# Altium PCB Sedra.PcbDoc
Units mm, origin at the board's own origin, x right, y up, seen from the top; angles counter-clockwise.
Board outline 100 x 50 mm, 2 copper layers (Top Layer, Bottom Layer); 35 components, 13 nets, 89 pads, 32 vias.
Unrouted connection lines stored in the file: 10.
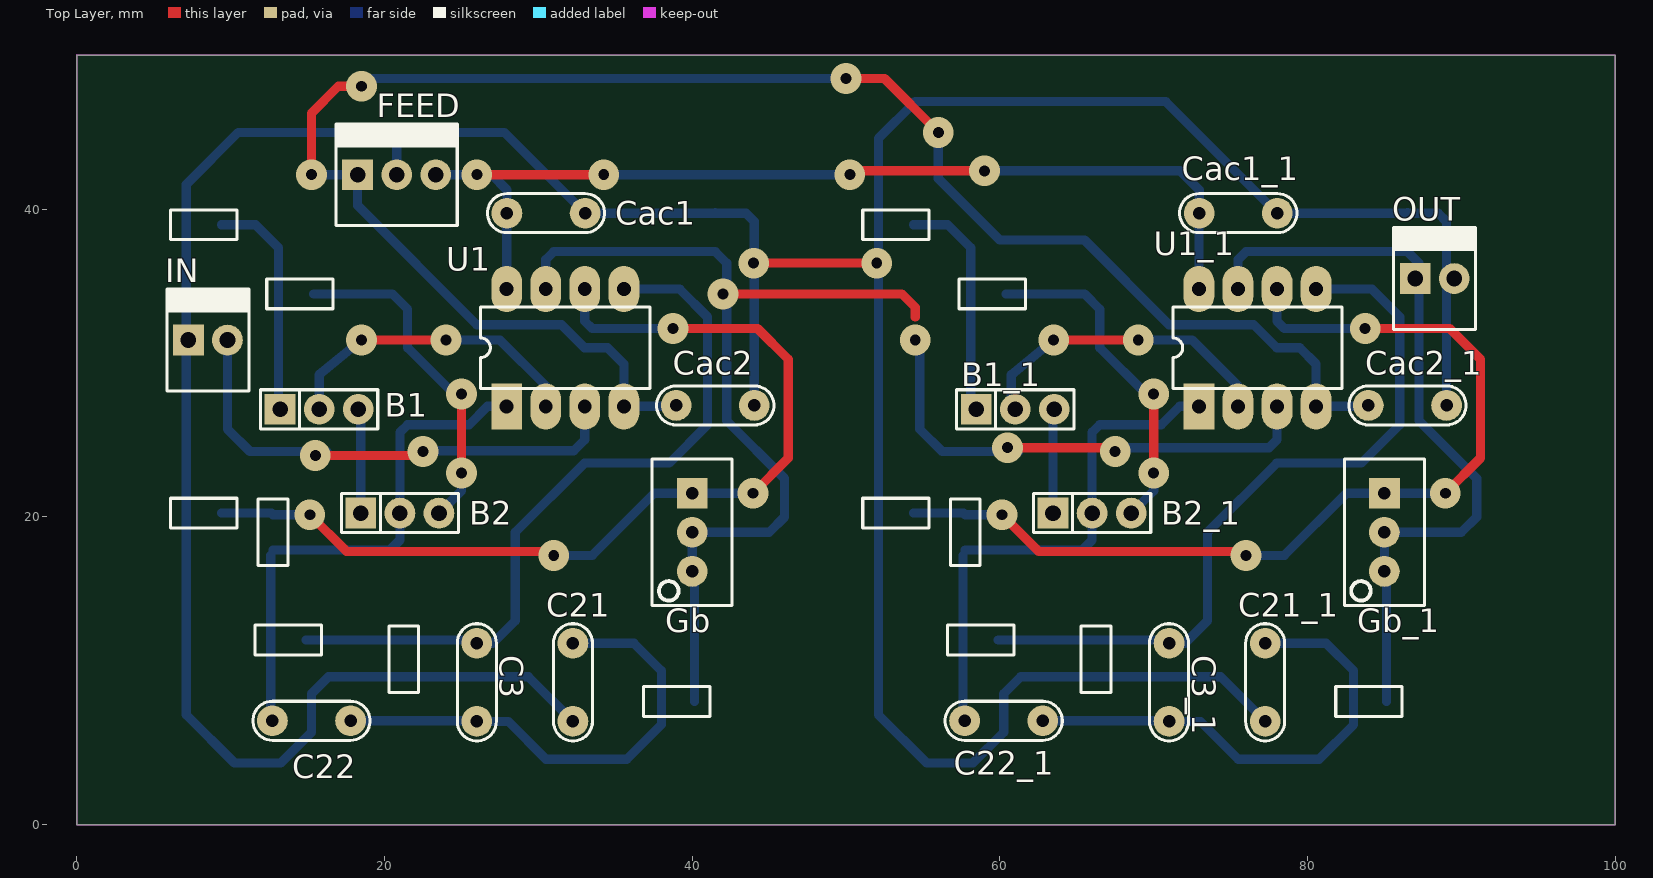
[diagram p0: Top Layer view]
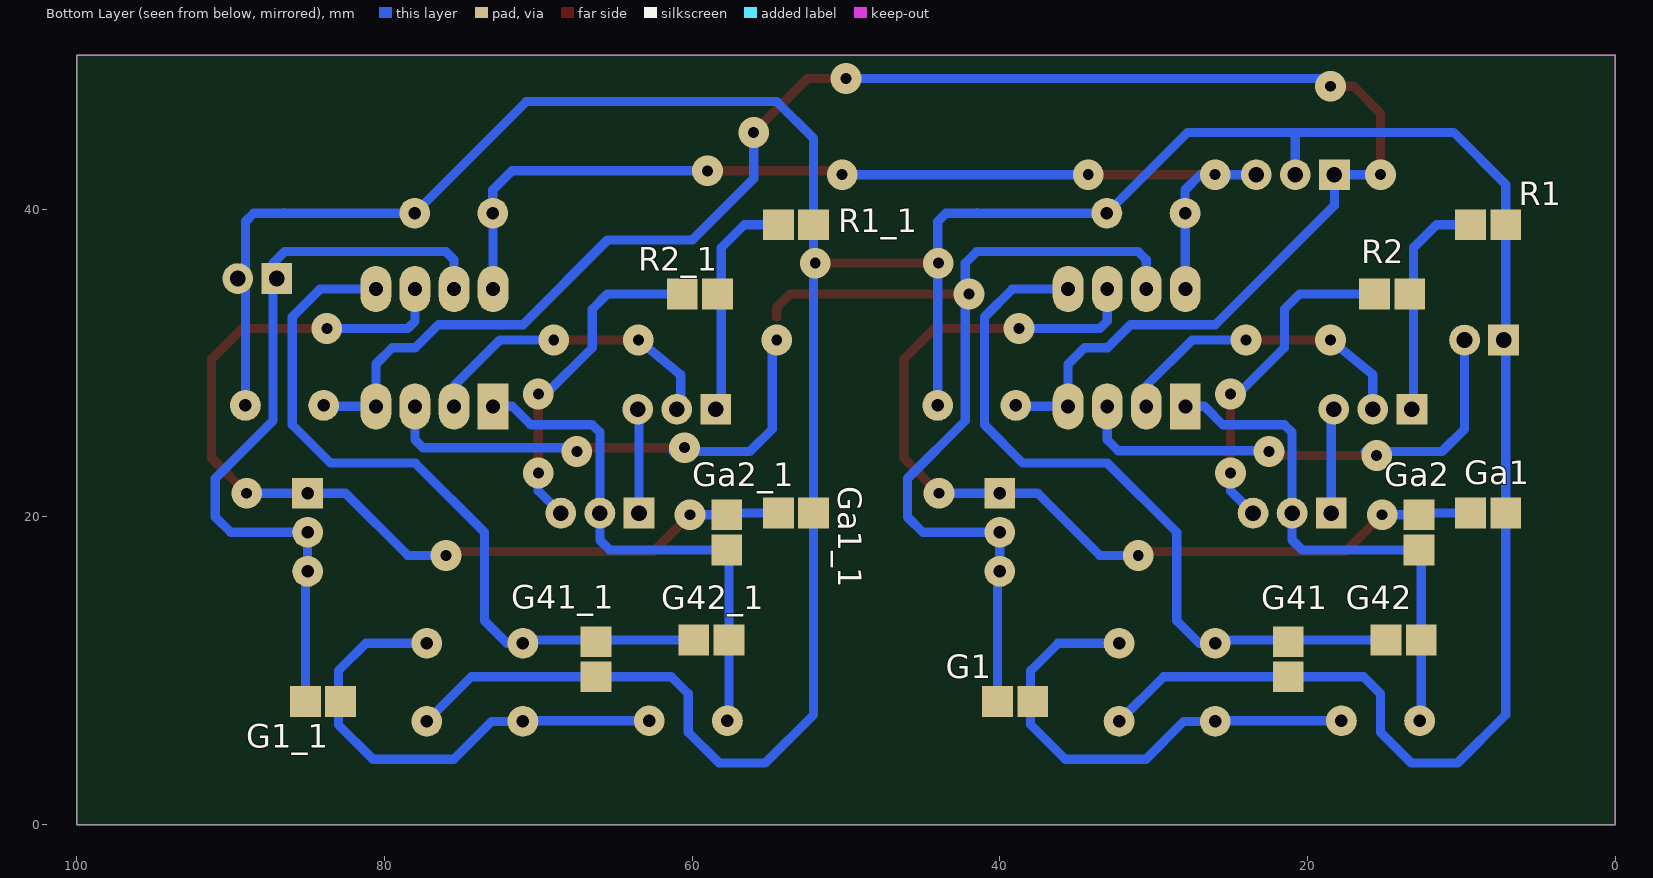
[diagram p1: Bottom Layer view, seen from below]
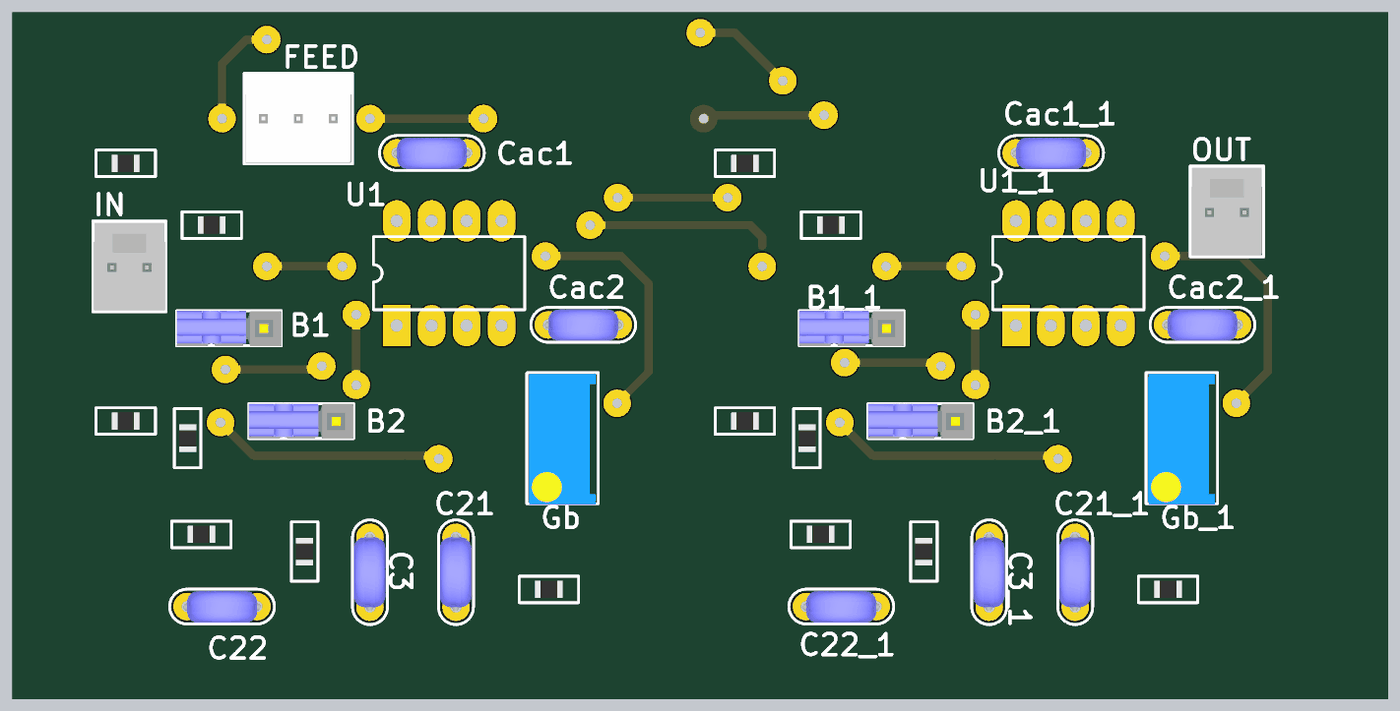
[diagram p2: 3D render of the assembled board from above, using the file's embedded part models]

## Layer stack, top to bottom
Top Solder: solder mask 0.0102, Solder Resist, Dk 3.5
Top Layer: signal copper 0.0356
Dielectric 1: dielectric 0.32, FR-4, Dk 4.8
Bottom Layer: signal copper 0.0356
Bottom Solder: solder mask 0.0102, Solder Resist, Dk 3.5

## Board outline
0,0 0,50 100,50 100,0 0,0

## Design rules (kind name [scope] priority, off if disabled: settings)
Clearance [All] p1: gap=0.2
PolygonConnect [All] p1: connectstyle=Relief reliefconductorwidth=0.254 reliefentries=4 polygonreliefangle="90 Angle" airgapwidth=0.254
RoutingVias [All] p1: holewidth=0.711 width=1.27 viastyle="Through Hole" minholewidth=0.711 minwidth=1.27 maxholewidth=0.711 maxwidth=1.27
SolderMaskExpansion [All] p1: expansion=0.102
Width [All] p1: maxlimit=0.6 minlimit=0.6 preferedwidth=0.6
30 further rules are at their usual default settings.

## Classes and differential pairs
component class Sedra: B1 B2 C3 C21 C22 Cac1 Cac2 FEED G1 G41 G42_1 Ga1 Ga2 Gb IN R1 R2 U1

## Components (designator, comment, footprint, x,y, rotation, side; value= is the part's Value field where it differs from the comment)
B1 "JUMPER" JUMPER3 15.75,27 r0 top
B1_1 "JUMPER" JUMPER3 61,27 r0 top (schematic designator B1)
B2 "JUMPER" JUMPER3 21,20.25 r0 top
B2_1 "JUMPER" JUMPER3 66,20.25 r0 top (schematic designator B2)
C3 "CAP" CAP200 26,9.25 r270 top
C3_1 "CAP" CAP200 71,9.25 r270 top (schematic designator C3)
C21 "CAP" CAP200 32.25,9.25 r270 top
C21_1 "CAP" CAP200 77.25,9.25 r270 top (schematic designator C21)
C22 "CAP" CAP200 15.25,6.75 r0 top
C22_1 "CAP" CAP200 60.25,6.75 r0 top (schematic designator C22)
Cac1 "CAP" CAP200 30.5,39.75 r0 top
Cac1_1 "CAP" CAP200 75.5,39.75 r0 top (schematic designator Cac1)
Cac2 "CAP" CAP200 41.5,27.25 r0 top
Cac2_1 "CAP" CAP200 86.5,27.25 r0 top (schematic designator Cac2)
FEED "MOLEX3" MOLEX3 18.25,42.25 r0 top
G1 "RES" 0805 39,8 r0 top
G1_1 "RES" 0805 84,8 r0 top (schematic designator G1)
G41 "RES" 0805 21.25,10.75 r90 top
G41_1 "RES" 0805 66.25,10.75 r90 top (schematic designator G41)
G42 "RES" 0805 13.75,12 r0 top
G42_1 "RES" 0805 58.75,12 r0 top (schematic designator G42)
Ga1 "RES" 0805 8.25,20.25 r0 top
Ga1_1 "RES" 0805 53.25,20.25 r0 top (schematic designator Ga1)
Ga2 "RES" 0805 12.75,19 r90 top
Ga2_1 "RES" 0805 57.75,19 r90 top (schematic designator Ga2)
Gb "PRESET" "PRESET V" 40,19 r270 top
Gb_1 "PRESET" "PRESET V" 85,19 r270 top (schematic designator Gb)
IN "MOLEX2" MOLEX2 7.25,31.5 r0 top
OUT "MOLEX2" MOLEX2 87,35.5 r0 top (schematic designator IN)
R1 "RES" 0805 8.25,39 r0 top
R1_1 "RES" 0805 53.25,39 r0 top (schematic designator R1)
R2 "RES" 0805 14.5,34.5 r0 top
R2_1 "RES" 0805 59.5,34.5 r0 top (schematic designator R2)
U1 "TL082ACN" DIP8 31.75,31 r0 top
U1_1 "TL082ACN" DIP8 76.75,31 r0 top (schematic designator U1)

## Footprints (in the part's own frame and the unit in brackets; to place one, negate y for a bottom-side part, rotate by r counter-clockwise, add the part's x,y. Pads: shape width x height; smd on the part's side, far side on the other; paste and mask are expansions set on the pad)
0805 [mm] "Pasivo 0805"
  rect 2x2 smd far side: 1(-1.143,0) 2(1.143,0)
  silkscreen extent -2.16,-0.97 2.16,0.97, body extent -1,-0.62 1,0.63, height 0.39
CAP200 [mm]
  round 2 hole 0.813: 1(-2.54,0) 2(2.54,0)
  silkscreen extent -3.81,-1.27 3.81,1.27, body extent -2.79,-1.17 2.79,1.12, height 6.24
DIP8 [mm] "DIP; 8 Leads; Row Spacing 7.62 mm; Pitch 2.54 mm"
  rect 2x3 hole 0.9: 1(-3.81,-3.81)
  oval 2x3 hole 0.9: 2(-1.27,-3.81) 3(1.27,-3.81) 4(3.81,-3.81) 5(3.81,3.81) 6(1.27,3.81) 7(-1.27,3.81) 8(-3.81,3.81)
  silkscreen extent -5.5,-2.65 5.5,2.65
JUMPER3 [mm]
  rect 2x2 hole 1.016: 1(-2.54,0)
  round 2 hole 1.016: 2(0,0) 3(2.54,0)
  silkscreen extent -3.81,-1.27 3.81,1.27, body extent -3.81,-1.3 3.81,1.27, height 16.15
MOLEX2 [mm]
  rect 2x2 hole 1.016: 1(0,0)
  round 2 hole 1.016: 2(2.54,0)
  silkscreen extent -1.4,-3.3 3.94,3.3, body extent -1.27,-3.17 3.81,3.17, height 10.74
MOLEX3 [mm]
  rect 2x2 hole 1.016: 1(0,0)
  round 2 hole 1.016: 2(2.54,0) 3(5.08,0)
  silkscreen extent -1.4,-3.3 6.48,3.3, body extent -1.27,-3.17 6.35,3.17, height 10.74
"PRESET V" [mm]
  rect 2x2 hole 0.813: 1(-2.54,0)
  round 2 hole 0.813: 2(0,0) 3(2.54,0)
  silkscreen extent -4.76,-2.6 4.76,2.6, body extent -4.7,-2.42 4.83,2.42, height 11.55

## Part data
B1 B1_1 B2 B2_1: library part JUMPER3
U1 U1_1: "General-Purpose J-FET Dual Operational Amplifier"

## Via types
v1: diameter 2, hole 0.711, Top Layer to Bottom Layer, 32 vias

## Nets (pads, with @x,y where several pads share a name; then routed paths per layer and width w, separated by ;. In a path a pad name is that pad's centre, name@x,y a point inside that pad or via, vN(x,y) a via of type N, cw(c..) or ccw(c..) an arc to the next point about the centre after c; other vN are vias at no path point)
+VCC: Cac1.1 Cac1_1.1 FEED.3 U1.8 U1_1.8 | length 65.5
  Top Layer w0.6: v1(26,42.25) v1(34.25,42.25) ; v1(50.25,42.25) 50.5,42.5 v1(59,42.5)
  Bottom Layer w0.6: FEED.3 v1(26,42.25) 26.96,42.25 27.96,41.25 Cac1.1 27.94,39.73 U1.8 ; v1(34.25,42.25) v1(50.25,42.25) ; v1(59,42.5) 71.71,42.5 72.96,41.25 Cac1_1.1 72.94,39.73 U1_1.8
-VCC: Cac2.1 Cac2_1.1 FEED.1 U1.4 U1_1.4 | length 118.4
  Top Layer w0.6: v1(15.25,42.25) 15.25,46.25 17,48 v1(18.5,48) ; v1(50,48.5) 52.5,48.5 v1(56,45)
  Bottom Layer w0.6: v1(15.25,42.25) FEED.1 18.25,40.25 26,32.5 31.5,32.5 33,31 34.5,31 35.56,29.94 U1.4 Cac2.1@38.9,27.19 ; v1(18.5,48) 19,48.5 v1(50,48.5) ; v1(56,45) 56,42 60,38 65.5,38 71,32.5 76.5,32.5 78,31 79.5,31 80.56,29.94 U1_1.4 Cac2_1.1@83.9,27.19
GND: C21.2 C21_1.2 Cac1.2 Cac1_1.2 Cac2.2 Cac2_1.2 FEED.2 G41.1 G41_1.1 Ga1.1 Ga1_1.1 IN.1 OUT.2 R1.1 R1_1.1 | length 251.4
  Top Layer w0.6: v1(44,36.5) v1(52,36.5)
  Bottom Layer w0.6: FEED.2 20.79,44.96 ; C21.2 29.353,9.607 G41.1 16.357,9.607 15.25,8.5 15.25,6 13.25,4 10.25,4 7.107,7.143 Ga1.1 R1.1 7.107,41.607 10.5,45 27.79,45 Cac1.2 41.54,39.75 ; 41.5,39.79 41.54,39.75 ; Cac2.2 44.04,39.21 43.5,39.75 41.54,39.75 ; C21_1.2 74.353,9.607 G41_1.1 61.357,9.607 60.25,8.5 60.25,6 58.25,4 55.25,4 52.107,7.143 Ga1_1.1 R1_1.1 52.107,44.607 54.5,47 70.79,47 Cac1_1.2 86.54,39.75 ; 86.5,39.79 86.54,39.75 ; Cac2_1.2 89.04,39.21 88.5,39.75 86.54,39.75
NetB1_1: B1.1 B1_1.1 R1.2 R1_1.2 R2.1 R2_1.1 | length 29.5
  Bottom Layer w0.6: R1.2 11.607,39 13.107,37.5 13.107,34 B1.1@13.107,27.103 ; R1_1.2 56.607,39 58.107,37.5 58.107,34 B1_1.1@58.107,27.103
NetB1_2: B1.2 B1_1.2 U1.2 U1_1.2 | length 40.7
  Top Layer w0.6: v1(18.5,31.5) v1(24,31.5) ; v1(63.5,31.5) v1(69,31.5)
  Bottom Layer w0.6: B1.2 15.75,29.25 v1(18.5,31.5) ; v1(24,31.5) 27.5,31.5 30.48,28.52 U1.2 ; B1_1.2@60.75,27 60.75,29.25 v1(63.5,31.5) ; v1(69,31.5) 72.5,31.5 75.48,28.52 U1_1.2
NetB1_3: B1.3 B1_1.3 B2.1 B2_1.1 | length 12.5
  Bottom Layer w0.6: B2.1 B1.3@18.46,26.5 ; B2_1.1 B1_1.3@63.46,26.5
NetB2_2: B2.2 B2_1.2 C22.1 C22_1.1 G42.1 G42_1.1 Ga2.1 Ga2_1.1 U1.1 U1_1.1 | length 67.6
  Bottom Layer w0.6: C22.1@12.607,6.853 G42.1 Ga2.1@12.607,17.5 ; Ga2.1 20.357,17.857 21,18.5 B2.2 21,25.5 21.5,26 25.5,26 26.69,27.19 U1.1 ; C22_1.1@57.607,6.853 G42_1.1 Ga2_1.1@57.607,17.5 ; Ga2_1.1 65.357,17.857 66,18.5 B2_1.2 66,25.5 66.5,26 70.5,26 71.69,27.19 U1_1.1
NetB2_3: B2.3 B2_1.3 R2.2 R2_1.2 | length 44.2
  Top Layer w0.6: v1(25,22.855) v1(25,28) ; v1(70,22.855) v1(70,28)
  Bottom Layer w0.6: R2.2@15.393,34.5 20.5,34.5 21.5,33.5 21.5,31 24.5,28 v1(25,28) ; B2.3 25,21.71 v1(25,22.855) ; R2_1.2@60.393,34.5 65.5,34.5 66.5,33.5 66.5,31 69.5,28 v1(70,28) ; B2_1.3 70,21.71 v1(70,22.855)
NetC3_1: C3.1 C3_1.1 G41.2 G41_1.2 G42.2 G42_1.2 U1.5 U1_1.5 | length 97.3
  Bottom Layer w0.6: G42.2 25.79,12 C3.1 27.04,11.79 28.5,13.25 28.5,19 33,23.5 38.5,23.5 41,26 41,33 39.19,34.81 U1.5 ; G42_1.2 70.79,12 C3_1.1 72.04,11.79 73.5,13.25 73.5,19 78,23.5 83.5,23.5 86,26 86,33 84.19,34.81 U1_1.5
NetC3_2: C3.2 C3_1.2 C21.1 C21_1.1 C22.2 C22_1.2 G1.1 G1_1.1 | length 64.6
  Bottom Layer w0.6: C22.2 C3.2@25.96,6.75 ; C3.2 28.04,6.71 30.5,4.25 35.75,4.25 38,6.5 38,10 36.21,11.79 C21.1 C21.1@32.107,11.933 ; C22_1.2 C3_1.2@70.96,6.75 ; C3_1.2 73.04,6.71 75.5,4.25 80.75,4.25 83,6.5 83,10 81.21,11.79 C21_1.1 C21_1.1@77.107,11.933
NetG1_2: G1.2 G1_1.2 Gb.2 Gb.3 Gb_1.2 Gb_1.3 OUT.1 U1.7 U1_1.7 | length 112.6
  Top Layer w0.6: v1(42,34.5) 53.621,34.5 54.5,33.621 54.5,33
  Bottom Layer w0.6: U1.7 30.48,36.73 31,37.25 41.5,37.25 42.25,36.5 42.25,26.25 46,22.5 46,20 45,19 Gb.2 Gb.3 ; G1.2 Gb.3@40.143,16.317 ; U1_1.7 75.48,36.73 76,37.25 86.5,37.25 87.25,36.5 87.25,26.25 91,22.5 91,20 90,19 Gb_1.2 Gb_1.3 ; G1_1.2 Gb_1.3@85.143,16.317
NetGa1_2: Ga1.2 Ga1_1.2 Ga2.2 Ga2_1.2 Gb.1 Gb_1.1 U1.6 U1_1.6 | length 126.4
  Top Layer w0.6: v1(15.143,20.143) 17.536,17.75 30.75,17.75 v1(31,17.5) ; v1(38.75,32.25) 44.25,32.25 46.25,30.25 46.25,23.83 v1(43.96,21.54) ; v1(60.143,20.143) 62.536,17.75 75.75,17.75 v1(76,17.5) ; v1(83.75,32.25) 89.25,32.25 91.25,30.25 91.25,23.83 v1(88.96,21.54)
  Bottom Layer w0.6: Ga1.2 Ga2.2@12.643,20.25 ; Ga2.2 v1(15.143,20.143) ; v1(31,17.5) 33.5,17.5 37.54,21.54 Gb.1 v1(43.96,21.54) ; U1.6 33.02,32.73 33.5,32.25 v1(38.75,32.25) ; Ga1_1.2 Ga2_1.2@57.643,20.25 ; Ga2_1.2 v1(60.143,20.143) ; v1(76,17.5) 78.5,17.5 82.54,21.54 Gb_1.1 v1(88.96,21.54) ; U1_1.6 78.02,32.73 78.5,32.25 v1(83.75,32.25)
NetIN_2: IN.2 U1.3 U1_1.3 | length 65.9
  Top Layer w0.6: v1(15.5,24) 22.25,24 v1(22.5,24.25) ; v1(60.5,24.5) 67.25,24.5 v1(67.5,24.25)
  Bottom Layer w0.6: IN.2 9.79,25.71 11.25,24.25 v1@16.25,24.25 ; v1(22.5,24.25) 22.55,24.3 32.3,24.3 33.02,25.02 U1.3 ; v1@54.79,31.5 54.79,25.71 56.25,24.25 v1@61.25,24.25 ; v1(67.5,24.25) 67.75,24.5 77.5,24.5 78.02,25.02 U1_1.3
  other v1: 54.5,31.5

## Keep-outs
Keep-Out Layer:
  lines w0.1: 0,50.038 0.038,50 ; 0,0 100,0 100,50 0,50 0,0